# EAGLE board PowerStick_double (EAGLE 7.2.0)
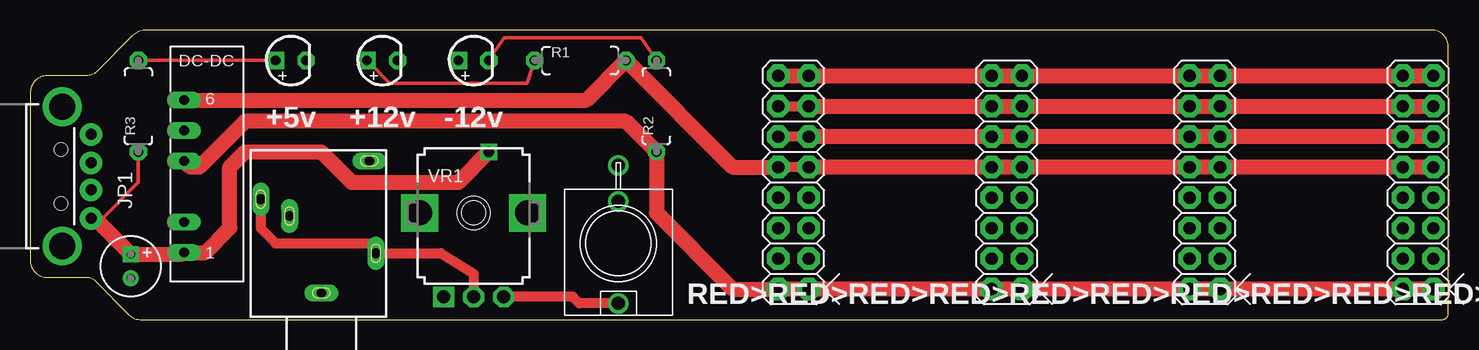
[diagram p0: board, top side]
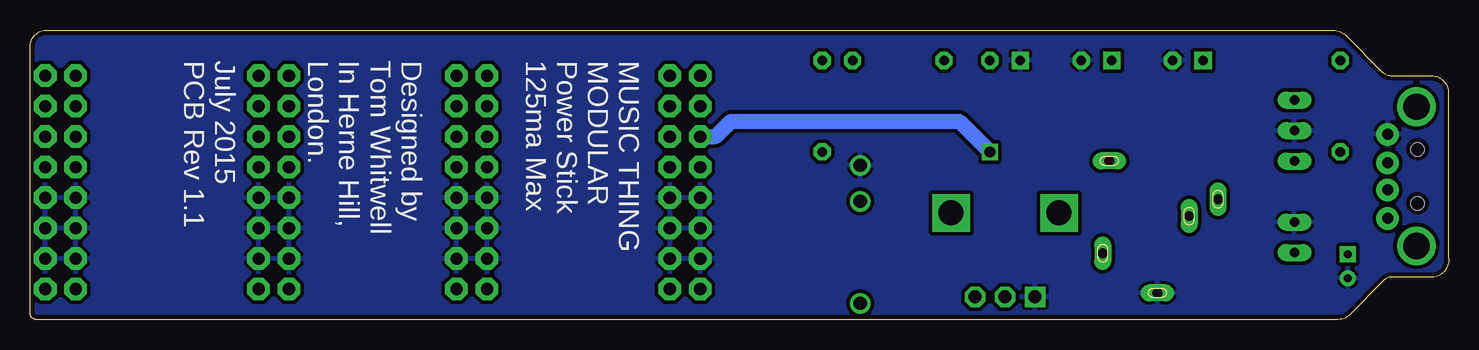
[diagram p1: board, bottom side, seen from below]

Size 118.25 x 24.13 mm. Coordinates in mm from the lower left corner, seen from the top.
Outline: 0.02,18.91 0.02,5.21 arc90 1.18,3.54 4.72,3.54 arc-45 5.43,3.24 8.25,0.4 arc45 9.2,0 117.73,0 arc90 118.24,0.51 118.24,22.54 arc90 116.99,24.13 9.76,24.13 arc44 8.52,23.63 5.6,20.7 arc-45 4.7,20.32 1.42,20.32 arc90 0.02,18.91
Copper layers (1*2*15*16): Top 0.035mm / dielectric 0.2mm / Route2 0.0175mm / dielectric 1.1mm / Route15 0.0175mm / dielectric 0.2mm / Bottom 0.035mm
Design rules "MT design rules rev2": minimum track width 6mil, minimum drill 12mil, track to track 12mil, track to pad 12mil, pad to pad 10mil, via to via 10mil, smd to smd 0mil, copper to edge 15mil, drill to drill 13mil, minimum pad ring 12mil, minimum via ring 6mil, stop-mask expansion 2mil, vias tented up to drill 25mil, thermal gap 10mil
Net classes: 0 default: width 0.457 mm; 1 +12V: width 0.61 mm; 2 -12V: width 0.61 mm; 3 COM: width 0.61 mm

## Footprints (pad centres in the part's own frame; a part is rotated, then mirrored left to right if it is on the bottom)
LED3MM = drill 0.813 square: A -1.27,0 | drill 0.813 octagon: K 1.27,0
050_020 = drill 0.7 square: + -1,0 | drill 0.7: - 1,0
NMA = drill 0.813 long: 1 0,6.35; 2 0,3.81; 4 0,-1.27; 5 0,-3.81; 6 0,-6.35
WQP-PJ301M-12_JACK = drill 1.1: P$1 0,5; P$2 0,-3.5; P$3 0,-6.5
USB-A-H = drill 0.914 pad 1.88: D+ 2.4,1.127; D- 2.4,-1.127; GND 2.4,3.5; VBUS 2.4,-3.5 | drill 2.2: GND2 0,-5.8; GND3 0,5.8 | hole 1.1: -0.1,2.25; -0.1,-2.25
7MM_RESISTOR = drill 0.813 octagon: 1 -3.81,0; 2 3.81,0
POWER_16 = drill 1.016 pad 1.88 octagon: 1 -6.35,-1.27; 2 -6.35,1.27; 3 -3.81,-1.27; 4 -3.81,1.27; 5 -1.27,-1.27; 6 -1.27,1.27; 7 1.27,-1.27; 8 1.27,1.27; 9 3.81,-1.27; 10 3.81,1.27; 11 6.35,-1.27; 12 6.35,1.27; 13 8.89,-1.27; 14 8.89,1.27; 15 11.43,-1.27; 16 11.43,1.27
9MM_SNAP-IN_POT = drill 1.1 pad 1.676 square: 1 -2.5,-7 | drill 1.1 pad 1.676 octagon: 2 0,-7; 3 2.5,-7 | drill 2.1 pad 2.8 square: M1 4.5,0; M2 -4.5,0
1503_09 = drill 0.8 pad 1.2 long: 1 0,-2.1; 2 -4.55,-5.4; 3 5.05,-9.9; 4 -4,-13.1; 5 2.65,-8.5

## Placement (x,y rotation side)
5V  [LED3MM]  21.74,21.59 0 top
+12  [LED3MM]  29.36,21.59 0 top
-12  [LED3MM]  36.98,21.59 0 top
C1  47uf 16v  [050_020]  8.4,4.45 270 top
DC1  [NMA]  12.85,11.94 180 top
J1  WQP-PJ301M-12_JACK  [WQP-PJ301M-12_JACK]  49.04,6.35 180 top
JP1  USB-A-H  [USB-A-H]  2.69,11.94 0 top
R1  2k  [7MM_RESISTOR]  45.87,21.59 0 top
R2  2k  [7MM_RESISTOR]  52.22,17.78 90 top
R3  2k  [7MM_RESISTOR]  9.04,17.78 90 top
U$1  POWER  [POWER_16]  63.65,8.89 90 top
U$2  POWER  [POWER_16]  81.43,8.89 90 top
U$3  POWER  [POWER_16]  97.94,8.89 90 top
U$4  POWER  [POWER_16]  115.72,8.89 90 top
VR1  50K B  [9MM_SNAP-IN_POT]  36.98,8.89 0 top
X1  1503_09  [1503_09]  24.28,0.13 180 top

## Library data of the parts
5V +12 -12 = TomW
C1 = gm-caps-electro-pol
DC1 = dc-dc-converter; MF: C & D TECHNOLOGIES, INC; MPN: NMA0515SC; OC_FARNELL: 1021434; OC_NEWARK: 61K3064
J1 = thonkiconn
JP1 = SparkFun-Connectors
R1-R3 VR1 = MusicThingModular
U$1-U$4 = eurorack
X1 = con-lumberg; OC_FARNELL: 1243244; OC_NEWARK: unknown

## Nets
5V [+12V]: C1.+ DC1.1 JP1.VBUS R3.1 U$1.11 U$1.12 U$2.11 U$2.12 U$3.11 U$3.12 U$4.11 U$4.12
+12V [+12V]: DC1.6 R1.2 U$1.9 U$1.10 U$2.9 U$2.10 U$3.9 U$3.10 U$4.9 U$4.10
-12V [-12V]: DC1.4 R2.1 U$1.1 U$1.2 U$2.1 U$2.2 U$3.1 U$3.2 U$4.1 U$4.2
COM [COM]: 5V.K +12.K -12.A C1.- DC1.2 DC1.5 J1.P$3 JP1.GND U$1.3 U$1.4 U$1.5 U$1.6 U$1.7 U$1.8 U$2.3 U$2.4 U$2.5 U$2.6 U$2.7 U$2.8 U$3.3 U$3.4 U$3.5 U$3.6 U$3.7 U$3.8 U$4.3 U$4.4 U$4.5 U$4.6 U$4.7 U$4.8 VR1.1 X1.1
N$1: -12.K R2.2
N$2: U$1.13 U$1.14 U$2.13 U$2.14 U$3.13 U$3.14 U$4.13 U$4.14
N$3: U$1.15 U$1.16 U$2.15 U$2.16 U$3.15 U$3.16 U$4.15 U$4.16
N$4: 5V.A R3.2
N$5: +12.A R1.1
N$6: J1.P$1 VR1.3
N$8: VR1.2 X1.2 X1.3

## Tracks (layer width: path | path; a pad name or v marks a point on that pad's centre or on a via)
5V  (via drill 0.9)
  Top 0.305: 5.41,8.44 6.05,8.44 9.04,11.43 R3.1
  Top 0.813: U$1.11 U$1.12
  Top 1.27: U$4.11 U$4.12 U$3.11 U$3.12 U$2.11 U$2.12 U$1.11 | JP1.VBUS 5.41,8.44 C1.+ 12.71,5.45 DC1.1 14.63,5.59 16.66,7.62 16.66,12.7 17.93,13.97 24.28,13.97 26.82,11.43 35.71,11.43 v38.25,13.97
  Bottom 1.27: U$1.12 61.11,15.24 59.84,16.51 40.79,16.51 v38.25,13.97
+12V
  Top 0.813: U$1.9 U$1.10
  Top 1.27: U$4.9 U$4.10 U$3.9 U$3.10 U$2.9 U$2.10 U$1.9 | DC1.6 46.38,18.29 R1.2 58.57,12.7 U$1.10
-12V
  Top 1.27: U$4.1 U$4.2 U$3.1 U$3.2 U$2.1 U$2.2 U$1.1 U$1.2 58.57,2.54 52.22,8.89 R2.1 49.68,16.51 17.93,16.51 14.12,12.7 13.36,12.7 DC1.4
COM
  pour Bottom: -1.12,26.67 124.61,26.67 124.61,-2.54 -1.12,-2.54
N$1
  Top 0.305: -12.K 39.52,23.5 50.95,23.5 R2.2
N$2
  Top 0.813: U$1.14 U$1.13
  Top 1.27: U$1.13 U$2.14 U$2.13 U$3.14 U$3.13 U$4.14 U$4.13
N$3
  Top 1.27: U$1.16 U$1.15 U$2.16 U$2.15 U$3.16 U$3.15 U$4.16 U$4.15
N$4
  Top 0.305: R3.2 5V.A
N$5
  Top 0.305: R1.1 41.42,19.68 29.99,19.68 +12.A
N$6
  Top 0.813: J1.P$1 45.79,1.35 45.23,1.91 39.49,1.91 VR1.3
N$8
  Top 0.813: X1.3 19.23,7.59 20.47,6.35 28.77,6.35 X1.2 34.25,5.53 36.98,3.81 VR1.2

## Text on the board
tPlace: +5v | +12v | -12v | RED>RED>RED>RED>RED>RED>RED>RED>RED>RED>
bPlace: MUSIC THING / MODULAR / Power Stick / 125ma Max / / / / Designed by / Tom Whitwell / In Herne Hill, / London. / / / July 2015 / PCB Rev 1.1